# EAGLE board DVforArduino (EAGLE 6.3)
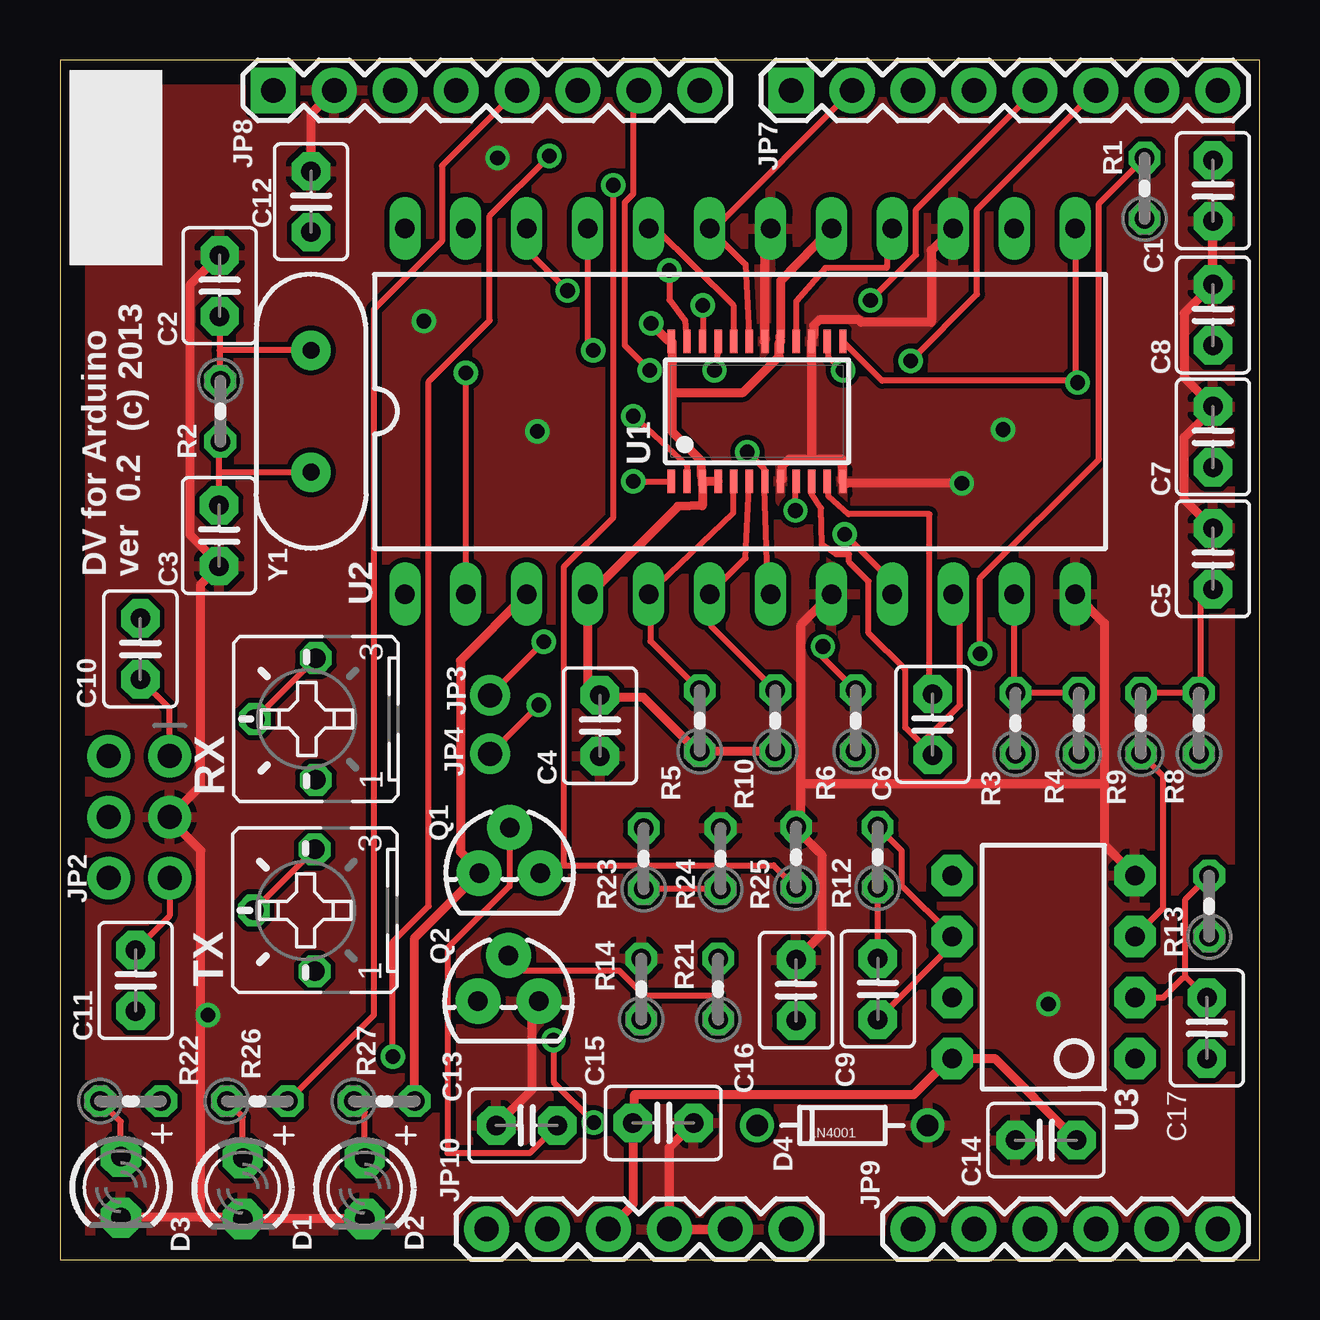
[diagram p0: board, top side]
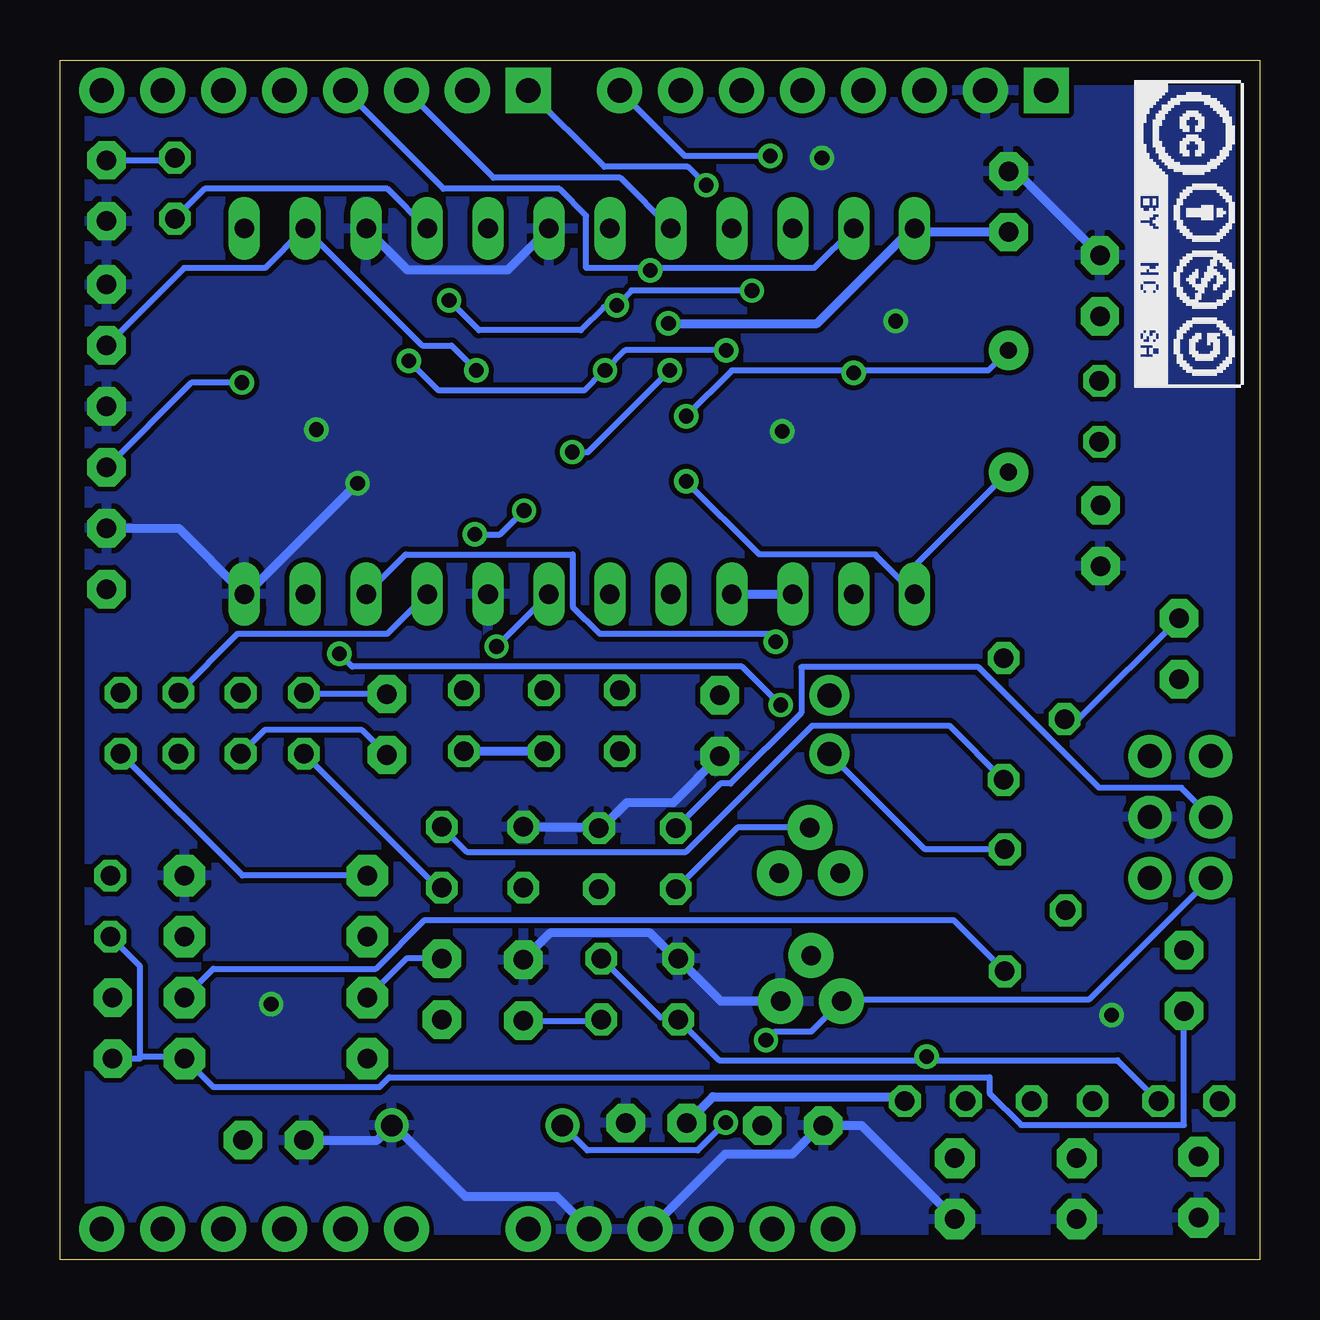
[diagram p1: board, bottom side, seen from below]

Size 50 x 50 mm. Coordinates in mm from the lower left corner, seen from the top.
Outline: 0,0 50,0 50,50 0,50 0,0
Copper layers (1*16): Top 0.035mm / dielectric 1.5mm / Bottom 0.035mm
Design rules "default": minimum track width 10mil, minimum drill 24mil, track to track 8mil, track to pad 8mil, pad to pad 8mil, via to via 8mil, smd to smd 8mil, copper to edge 40mil, drill to drill 8mil, minimum pad ring 10mil, minimum via ring 8mil, stop-mask expansion 4mil, vias tented up to drill 0mil, thermal gap 10mil
Net classes: 1 pwr: width 0.381 mm

## Footprints (pad centres in the part's own frame; a part is rotated, then mirrored left to right if it is on the bottom)
C2.5-3 = drill 0.813 pad 1.6 octagon: 1 -1.27,0; 2 1.27,0
LED3MM = drill 0.813 pad 1.676 octagon: A -1.27,0; K 1.27,0
DIODE-ZENER = drill 0.9: P$1 -3.556,0; P$2 3.556,0
2X03_ROUND_70MIL = drill 1 pad 1.778: 1 -2.54,1.27; 2 -2.54,-1.27; 3 0,1.27; 4 0,-1.27; 5 2.54,1.27; 6 2.54,-1.27
1X01_ROUND = drill 1 pad 1.676: 1 0,0
1X08 = drill 1.016 pad 1.88 square: 1 0,0 | drill 1.016 pad 1.88: 2 2.54,0; 3 5.08,0; 4 7.62,0; 5 10.16,0; 6 12.7,0; 7 15.24,0; 8 17.78,0
1X06 = drill 1.016 pad 1.88: 1 0,0; 2 2.54,0; 3 5.08,0; 4 7.62,0; 5 10.16,0; 6 12.7,0
TO-92 = drill 0.813 pad 1.88: 1 -1.27,0; 2 0,1.905; 3 1.27,0
0204V = drill 0.813 octagon: 1 -1.27,0; 2 1.27,0
B25P = drill 0.813 octagon: A -2.54,0; E 2.54,0; S 0,2.54
AIS_MK2_CML-MICRO_TSSOP24 = smd 0.305 x 0.991: 1 -3.575,-2.918; 2 -2.925,-2.918; 3 -2.275,-2.918; 4 -1.625,-2.918; 5 -0.975,-2.918; 6 -0.325,-2.918; 7 0.325,-2.918; 8 0.975,-2.918; 9 1.625,-2.918; 10 2.275,-2.918; 11 2.925,-2.918; 12 3.575,-2.918; 13 3.575,2.918; 14 2.925,2.918; 15 2.275,2.918; 16 1.625,2.918; 17 0.975,2.918; 18 0.325,2.918; 19 -0.325,2.918; 20 -0.975,2.918; 21 -1.625,2.918; 22 -2.275,2.918; 23 -2.925,2.918; 24 -3.575,2.918
AIS_MK2_CML-MICRO_DIL24-6 = drill 0.813 long: 1 -13.97,-7.62; 2 -11.43,-7.62; 3 -8.89,-7.62; 4 -6.35,-7.62; 5 -3.81,-7.62; 6 -1.27,-7.62; 7 1.27,-7.62; 8 3.81,-7.62; 9 6.35,-7.62; 10 8.89,-7.62; 11 11.43,-7.62; 12 13.97,-7.62; 13 13.97,7.62; 14 11.43,7.62; 15 8.89,7.62; 16 6.35,7.62; 17 3.81,7.62; 18 1.27,7.62; 19 -1.27,7.62; 20 -3.81,7.62; 21 -6.35,7.62; 22 -8.89,7.62; 23 -11.43,7.62; 24 -13.97,7.62
DIP08 = drill 0.813 pad 1.727 octagon: 1 -3.81,-3.81; 2 -1.27,-3.81; 3 1.27,-3.81; 4 3.81,-3.81; 5 3.81,3.81; 6 1.27,3.81; 7 -1.27,3.81; 8 -3.81,3.81
HC49US = drill 0.7 pad 1.651: 1 -2.54,0; 2 2.54,0

## Placement (x,y rotation side)
C1  470p  [C2.5-3]  48.06,44.55 270 top
C2  30p  [C2.5-3]  6.65,40.59 270 top
C3  30p  [C2.5-3]  6.63,30.18 90 top
C4  0.1u  [C2.5-3]  22.5,22.25 270 top
C5  1u  [C2.5-3]  48.06,29.21 90 top
C6  22p  [C2.5-3]  36.37,22.3 90 top
C7  27n  [C2.5-3]  48.06,34.29 90 top
C8  27n  [C2.5-3]  48.06,39.37 90 top
C9  470p  [C2.5-3]  34.09,11.28 90 top
C10  0.1u  [C2.5-3]  3.35,25.45 90 top
C11  1u  [C2.5-3]  3.15,11.63 90 top
C12  100n  [C2.5-3]  10.46,44.09 90 top
C13  1u  [C2.5-3]  19.46,5.59 180 top
C14  100n  [C2.5-3]  41.1,4.98 180 top
C15  1u  [C2.5-3]  25.15,5.69 0 top
C16  100p  [C2.5-3]  30.68,11.23 90 top
C17  470p  [C2.5-3]  47.8,9.65 270 top
D1  Green 3mm  [LED3MM]  7.62,2.95 270 top
D2  Yellow 3mm  [LED3MM]  12.7,2.95 270 top
D3  Red 3mm  [LED3MM]  2.54,3.01 270 top
D4  1N4001  [DIODE-ZENER]  32.61,5.59 0 top
JP2  RADIO  [2X03_ROUND_70MIL]  3.3,18.44 270 top
JP3  RX_FB  [1X01_ROUND]  17.93,23.52 0 top
JP4  [1X01_ROUND]  17.93,21.08 0 top
JP7  [1X08]  30.48,48.73 0 top
JP8  [1X08]  8.89,48.73 0 top
JP9  [1X06]  35.56,1.27 0 top
JP10  [1X06]  17.78,1.27 0 top
Q1  2N7000  [TO-92]  18.75,16.1 0 top
Q2  2N7000  [TO-92]  18.69,10.77 0 top
R1  100k  [0204V]  45.21,44.65 90 top
R2  1M  [0204V]  6.68,35.36 270 top
R3  100k  [0204V]  39.83,22.35 90 top
R4  100k  [0204V]  42.47,22.35 90 top
R5  47k  [0204V]  26.67,22.45 90 top
R6  47k  [0204V]  33.17,22.45 90 top
R8  47k  [0204V]  47.47,22.35 90 top
R9  47k  [0204V]  45.06,22.35 90 top
R10  47k  [0204V]  29.82,22.45 90 top
R12  100k  [0204V]  34.09,16.76 90 top
R13  100k  [0204V]  47.9,14.73 90 top
R14  47K  [0204V]  24.23,11.28 90 top
R21  330  [0204V]  27.43,11.28 90 top
R22  2.7K  [0204V]  2.95,6.6 0 top
R23  330  [0204V]  24.33,16.71 90 top
R24  1M  [0204V]  27.53,16.71 90 top
R25  100K  [0204V]  30.68,16.76 90 top
R26  2.7K  [0204V]  8.23,6.6 0 top
R27  2.7K  [0204V]  13.51,6.6 0 top
RX  200K  [B25P]  10.67,22.53 90 top
TX  500K  [B25P]  10.62,14.55 90 top
U1  CML-MICRO_CMX589AE2  [AIS_MK2_CML-MICRO_TSSOP24]  29.06,35.36 0 top
U2  CML-MICRO_CMX589AP4  [AIS_MK2_CML-MICRO_DIL24-6]  28.35,35.36 0 top
U3  OPAMP-DUALDIP  [DIP08]  41,12.19 90 top
Y1  4.9152MHz  [HC49US]  10.46,35.36 270 top

## Library data of the parts
C1-C17 = capacitor-wima
D1-D3 = adafruit
D4 Q1 Q2 = SparkFun-DiscreteSemi
JP2-JP4 = microbuilder
JP7-JP10 = SparkFun-Connectors
R1-R6 R8-R10 R12-R14 R21-R27 = resistor
RX TX = pot
U1 U2 = 12_dollar
U3 = SparkFun-AnalogIC
Y1 = SparkFun-FreqCtrl

## Nets
+3V3 [pwr]: C4.1 C12.1 C14.1 C15.1 JP10.3 Q1.1 R5.1 R6.1 R10.1 R27.2 U1.3 U1.4 U1.17 U1.24 U2.3 U2.4 U2.17 U2.24 U3.8
COS: JP7.1 Q1.3 R25.1
COS_LED: JP8.5 R26.2
DEBUG: JP8.4
DOC1: C7.1 U1.13 U2.13
DOC2: C8.1 U1.14 U2.14
GND [pwr]: C1.2 C2.1 C3.1 C4.2 C5.2 C7.2 C8.2 C12.2 C13.2 C14.2 C15.2 C16.2 D1.K D2.K D3.K D4.P$2 JP2.3 JP8.2 JP10.4 JP10.5 Q2.3 R14.2 R24.2 R25.2 U1.8 U1.12 U1.15 U1.18 U2.8 U2.12 U2.15 U2.18 U3.4
N$1: C13.1 Q1.2 R23.1 R24.1
N$2: D1.A R26.1
N$3: C10.2 RX.E RX.S
N$4: D2.A R27.1
N$7: C9.1 R12.2 RX.A U3.6
N$11: R8.1 U3.5
N$15: C11.1 C17.2 R13.1 U3.1
N$20: R9.1 U3.3
N$24: C16.1 Q2.2 R21.1
N$28: C17.1 R13.2 TX.A U3.2
N$33: D3.A R22.1
PLLACQ: JP8.7 R6.2 U1.7 U2.7
PTT: JP8.8 R14.1 R21.2 R22.2
RADIO_COS: JP2.4 R23.2
RADIO_PTT: D4.P$1 JP2.6 Q2.1
RADIO_RX: C10.1 JP2.1
RADIO_TX: C11.2 JP2.5
RX_FB: C6.1 JP3.1 R4.1 U1.10 U2.10
RX_SN: JP7.4 U1.23 U2.23
RXCLK: JP7.6 U1.21 U2.21
RXDATA: JP7.3 U1.20 U2.20
RXDCACQ: R10.2 U1.6 U2.6
RXHOLDN: R5.2 U1.5 U2.5
RXSIGNAL: C6.2 R3.2 R4.2 U1.11 U2.11
RXSIGNAL_R: C9.2 R3.1 R12.1 U3.7
TXCLK: JP7.5 U1.22 U2.22
TXDATA: JP7.2 U1.19 U2.19
TXOUT: R1.1 U1.16 U2.16
TXOUT_R: C1.1 JP4.1 R1.2 TX.E TX.S
VBIAS: C5.1 R8.2 R9.2 U1.9 U2.9
XTAL: C2.2 R2.1 U1.2 U2.2 Y1.1
XTALN: C3.2 R2.2 U1.1 U2.1 Y1.2

## Tracks (layer width: path | path; a pad name or v marks a point on that pad's centre or on a via)
+3V3  (via drill 0.61)
  Top 0.381: C14.1 38.96,8.38 U3.8 37.01,8.31 35.59,6.88 23.95,6.88 23.95,5.87 C15.1 23.88,2.29 JP10.3 | R27.2 14.78,13.41 Q1.1 17.4,16.28 16.69,16.99 16.69,24.97 U2.3 | R10.1 R5.1 26.49,21.26 24.31,23.44 22.68,23.44 C4.1 22,24.03 U2.4 22.17,27.81 25.76,31.39 26.77,31.42 26.77,32.31 U1.3 | U1.3 26.8,32.44 U1.4 | 25.53,36.14 25.53,34.49 26.75,33.27 26.75,32.64 U1.3 | 25.53,36.14 25.53,38.23 25.5,38.25 U1.24 25.3,38.35 v24.64,39.01 | 25.53,36.14 28.47,36.14 29.97,37.64 29.97,38.2 30.02,38.25 U1.17 30,38.46 30.05,38.48 30.05,40.79 U2.17
  Bottom 0.381: R27.2 14.96,6.78 22.78,6.78 C15.1 | R10.1 R6.1 | U2.4 U2.3 | C12.1 14.22,42.82 U2.24 14.55,42.9 18.44,39.01 v24.64,39.01
COS  (via drill 0.61)
  Top 0.254: R25.1 29.74,16.43 21.01,16.43 | 21.01,16.43 20.02,16.43 Q1.3 | v23.06,44.78 23.06,30.94 21.01,28.88 21.01,16.43
  Bottom 0.254: v23.06,44.78 23.82,45.54 27.3,45.54 30.48,48.72 JP7.1
COS_LED
  Top 0.254: R26.2 13.08,10.19 13.08,39.6 15.93,42.44 15.93,45.59 19.05,48.72 JP8.5
DOC1  (via drill 0.61)
  Top 0.254: 42.32,36.63 34.27,36.63 32.64,38.25 U1.13 | U2.13 42.32,36.63 | v42.42,36.55 42.32,36.63
  Bottom 0.254: C7.1 44.53,36.55 v42.42,36.55
DOC2  (via drill 0.61)
  Top 0.254: v32.64,37.06 32.03,37.62 32.03,38.18 32,38.25 U1.14
  Bottom 0.254: v32.64,37.06 33.68,38.1 34.9,38.1 U2.14 39.88,42.9 41.45,41.33 44.83,41.33 C8.1
GND  (via drill 0.61)
  Top 0.381: 31.34,33.35 32.61,33.35 32.61,32.46 U1.12 32.82,32.36 v37.59,32.36 | 31.34,33.35 30.38,33.35 30.1,33.07 30.1,32.51 30.05,32.46 U1.8 | 31.34,33.35 31.34,38.25 U1.15 31.37,38.46 31.42,38.51 31.42,38.94 31.65,39.17 33.3,39.17 33.4,39.06 36.32,39.06 36.32,42.06 U2.15 | U2.18 29.36,42.72 29.36,38.28 U1.18 | C1.2 C8.2 46.86,39.45 46.86,36.75 C7.2 47.98,35.38 46.86,34.27 46.86,31.67 C5.2 | U3.4 43.54,17.27 43.54,19.84 | 43.54,19.84 43.54,26.52 U2.12 | C12.2 10.46,47.75 11.43,48.72 JP8.2 | C2.1 5.44,40.64 5.44,30.2 6.55,29.08 C3.1 5.87,28.14 5.87,19.74 JP2.3 4.65,18.26 5.87,17.04 5.87,1.75 | U2.8 30.89,26.47 30.89,19.84 | 30.89,19.84 30.89,18.24 R25.2 30.76,17.86 31.75,16.87 31.75,13.56 C16.2 | C15.2 25.4,4.67 JP10.4 JP10.5 | D2.K 12.7,1.7 7.62,1.7 D1.K 7.44,1.75 5.87,1.75 | 5.87,1.75 2.54,1.75 D3.K | C13.2 19.66,7.06 19.66,10.46 Q2.3 | 30.89,19.84 43.54,19.84
  Bottom 0.381: U2.15 35.51,41.25 31.34,41.25 U2.18 | C5.2 45.06,30.48 U2.12 42.14,27.81 v37.59,32.36 | C2.1 10.16,45.36 C12.2 | R25.2 27.58,18.03 R24.2 27.36,18.06 26.36,19.05 24.43,19.05 C4.2 | C14.2 36.78,4.98 D4.P$2 35.99,5.51 33.1,2.62 29.29,2.62 JP10.5 | Q2.3 22.45,10.77 R14.2 24.41,12.62 25.4,13.61 29.57,13.61 C16.2 | D2.K 12.7,1.7 16.59,5.59 C13.2 18.36,5.51 19.48,4.39 22.28,4.39 JP10.4
  other vias: 39.32,34.59 19.89,34.52 41.2,10.64 15.16,39.12 18.24,45.92 6.17,10.19
  pour Bottom: 0,49.99 49.99,49.99 49.99,0 0,0
  pour Top: 0,49.99 49.99,49.99 49.99,0 0,0
N$1
  Top 0.254: R24.1 R23.1 | C13.1 19.58,4.45 16.15,4.45 16.15,12.98 18.75,15.57 Q1.2
  Bottom 0.254: R23.1 21.77,18.01 Q1.2
N$2
  Top 0.254: R26.1 7.62,5.94 D1.A
N$3
  Top 0.254: RX.E RX.S
  Bottom 0.254: C10.2 7.54,22.53 RX.S
N$4
  Top 0.254: R27.1 12.7,6.15 D2.A
N$7
  Top 0.254: C9.1 37.19,13.11 U3.6 37.11,13.56 35.08,15.6 35.08,17.04 R12.2
  Bottom 0.254: RX.A 12.93,22.25 18.64,22.25 23.9,16.99 33.05,16.99 R12.2
N$11
  Bottom 0.254: R8.1 42.39,16 U3.5
N$15
  Bottom 0.254: R13.1 46.66,12.22 46.66,8.46 | 46.66,8.46 46.66,8.38 C17.2 | C11.1 3.15,5.61 9.93,5.61 11.25,6.93 11.25,7.59 36.27,7.59 36.68,7.19 43.61,7.19 U3.1 44.91,8.46 46.66,8.46
N$20
  Top 0.254: R9.1 46,20.14 46,14.66 U3.3
N$24
  Top 0.254: Q2.2 19.33,12.04 23.32,12.04 24.36,11 27.43,11 R21.1
  Bottom 0.254: R21.1 27.48,9.96 C16.1
N$28
  Top 0.254: R13.2 46.91,15.01 46.91,11.81 | C17.1 46.91,11.81 | U3.2 46,10.92 46.81,11.73 46.91,11.81
  Bottom 0.254: TX.A 12.75,14.15 34.8,14.15 36.83,12.12 43.61,12.12 U3.2
N$33
  Top 0.254: R22.1 2.54,5.74 D3.A
PLLACQ  (via drill 0.61)
  Top 0.254: U2.7 29.52,27.84 29.36,32.13 U1.7 29.36,32.56 29.36,32.94 v28.65,33.66 | R6.2 31.8,25.09 v31.8,25.55 | v24.59,37.06 23.55,38.1 23.55,44.07 23.9,44.42 23.9,48.49 24.13,48.72 JP8.7
  Bottom 0.254: U2.7 v31.8,25.55 | v24.59,37.06 27.99,33.66 v28.65,33.66
PTT  (via drill 0.61)
  Top 0.254: v20.4,46 17.91,43.51 17.91,39.14 15.37,36.6 15.37,14.73 13.87,13.23 v13.87,8.46
  Bottom 0.254: R22.2 5.92,8.31 13.87,8.31 | 13.87,8.31 22.53,8.31 R14.1 24.33,10.08 24.97,10.08 R21.2 | v20.4,46 23.95,46 26.67,48.72 JP8.8 | v13.87,8.46 13.87,8.31
RADIO_COS
  Bottom 0.254: R23.2 22.48,19.84 22.05,19.84 19.1,22.78 19.1,24.69 11.71,24.69 6.68,19.66 3.25,19.66 JP2.4
RADIO_PTT  (via drill 0.61)
  Top 0.254: v22.25,5.71 20.57,7.39 v20.57,9.14
  Bottom 0.254: D4.P$1 28.02,4.55 23.42,4.55 v22.25,5.71 | v20.57,9.14 20.22,9.5 18.69,9.5 Q2.1 17.32,10.85 7.09,10.85 JP2.6
RADIO_RX
  Top 0.254: C10.1 4.57,22.96 JP2.1
RADIO_TX
  Top 0.254: C11.2 4.57,14.33 JP2.5
RX_FB  (via drill 0.61)
  Top 0.254: U1.10 31.32,31.93 31.73,31.32 31.75,29.79 32.36,29.39 32.89,29.39 32.89,29.08 33.71,28.27 33.71,26.11 35.23,24.59 35.23,22.17 C6.1 35.99,21.59 37.52,23.11 37.52,27.46 U2.10 | v20.17,25.76 JP3.1
  Bottom 0.254: R4.1 41.48,22.07 37.41,22.07 C6.1 | v20.17,25.76 20.5,26.09 27.51,26.09 28.63,27.2 28.63,29.39 35.59,29.39 U2.10
RX_SN  (via drill 0.61)
  Top 0.254: v25.4,41.22 25.4,40.01 26.06,39.14 26.14,38.18 26.11,38.28 U1.23
  Bottom 0.254: U2.23 18.57,41.33 25.3,41.33 v25.4,41.22 25.48,41.33 28.07,41.33 28.07,43.51 29.18,44.63 34.01,44.63 38.1,48.72 JP7.4
RXCLK  (via drill 0.61)
  Top 0.254: v27.28,37.06 27.46,37.87 27.43,38.25 U1.21 | v22.23,37.9 22,38.12 U2.21 | v35.46,37.47 38.23,40.23 38.23,43.76 43.18,48.72 JP7.6
  Bottom 0.254: v22.23,37.9 26.44,37.9 v27.28,37.06 27.38,36.98 28.14,36.22 34.21,36.22 v35.46,37.47
RXDATA
  Top 0.254: U2.20 24.84,42.98 28.07,39.78 28.07,38.28 U1.20
  Bottom 0.254: U2.20 26.64,45.09 31.93,45.09 35.56,48.72 JP7.3
RXDCACQ
  Top 0.254: U1.6 28.73,32.21 28.57,29.23 U2.6 27.15,27.64 27.15,26.39 R10.2
RXHOLDN
  Top 0.254: U1.5 28.07,32.44 28.07,31.11 U2.5 24.61,27.64 24.61,25.78 R5.2
RXSIGNAL
  Top 0.254: R4.2 R3.2 39.78,23.72 U2.11 | C6.2 36.25,23.7 36.25,31.06 32.87,31.06 32.03,31.83 32.03,32.33 32,32.44 U1.11
  Bottom 0.254: R3.2 39.78,23.57 C6.2
RXSIGNAL_R
  Top 0.254: C9.2 R12.1
  Bottom 0.254: R3.1 34.24,15.49 R12.1 | U3.7 35.56,12.55 C9.2
TXCLK  (via drill 0.61)
  Top 0.254: v26.8,39.78 26.8,38.28 U1.22 | v21.16,40.39 19.46,42.09 U2.22 | v33.78,39.98 35.69,41.88 35.69,43.76 40.64,48.72 JP7.5
  Bottom 0.254: v21.16,40.39 26.19,40.39 v26.8,39.78 26.9,39.7 27.33,39.7 28.3,38.73 32.54,38.73 v33.78,39.98
TXDATA
  Top 0.254: U1.19 28.73,38.56 28.57,41.48 U2.19 27.28,42.95 27.28,42.98 33.02,48.72 JP7.2
TXOUT
  Top 0.254: U2.16 34.47,42.75 34.47,41.33 31.9,41.33 30.68,39.93 30.68,39.22 30.68,38.46 30.66,38.28 U1.16
  Bottom 0.254: R1.1 43.97,44.63 36.35,44.63 U2.16
TXOUT_R  (via drill 0.61)
  Top 0.254: TX.E TX.S | R1.2 43.31,44.02 43.31,33.35 38.35,28.4 v38.35,25.25 | JP4.1 v19.96,23.11
  Bottom 0.254: R1.2 45.31,45.82 C1.1 | JP4.1 13.95,17.09 TX.E | v38.35,25.25 37.82,24.71 21.57,24.71 v19.96,23.11
VBIAS  (via drill 0.61)
  Top 0.254: v30.66,31.22 30.66,32.44 U1.9 | v32.72,30.23 34.7,28.25 U2.9 | R9.2 R8.2 47.55,23.72 47.55,27.43 C5.1
  Bottom 0.254: v30.66,31.22 31.65,30.23 v32.72,30.23 | U2.9 36.35,26.09 42.6,26.09 R9.2
XTAL  (via drill 0.61)
  Top 0.254: R2.1 6.66,36.65 6.66,37.9 | C2.2 6.66,37.9 | 26.11,32.44 26.14,32.64 | 26.14,32.64 26.14,33.1 v23.9,35.15 | 26.14,32.64 U1.2 | v16.92,36.96 U2.2 | Y1.1 6.66,37.9
  Bottom 0.254: v23.9,35.15 22,37.06 16.92,37.06 | 16.92,37.06 11.3,37.06 Y1.1 | v16.92,36.96 16.92,37.06
XTALN  (via drill 0.61)
  Top 0.254: R2.2 6.63,34.04 6.63,32.82 | C3.2 6.63,32.82 | 6.63,32.82 Y1.2 | v23.9,32.44 U1.1
  Bottom 0.254: v23.9,32.44 20.85,29.39 16.03,29.39 U2.1 14.88,28.42 14.86,28.42 Y1.2

## Text on the board
tNames: (c) 2013 | 0.2 | DV for Arduino | ver